# Altium PCB LNA_LNANXPSOT1209_v1.PcbDoc
Units mm, origin at the board's own origin, x right, y up, seen from the top; angles counter-clockwise.
Board outline 60.2 x 8 mm, 2 copper layers (Top Layer, Bottom Layer); 22 components, 9 nets, 54 pads, 4 vias.
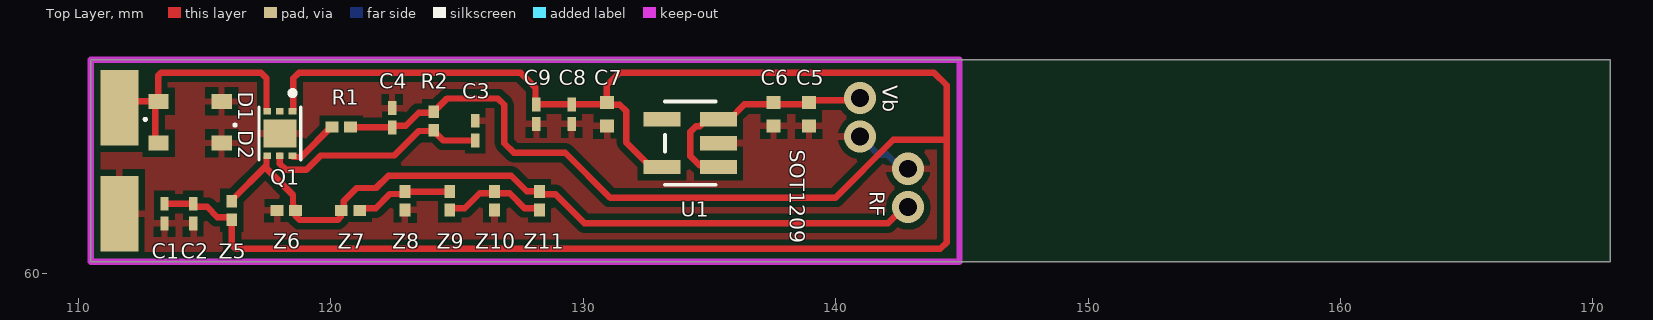
[diagram p0: Top Layer view]
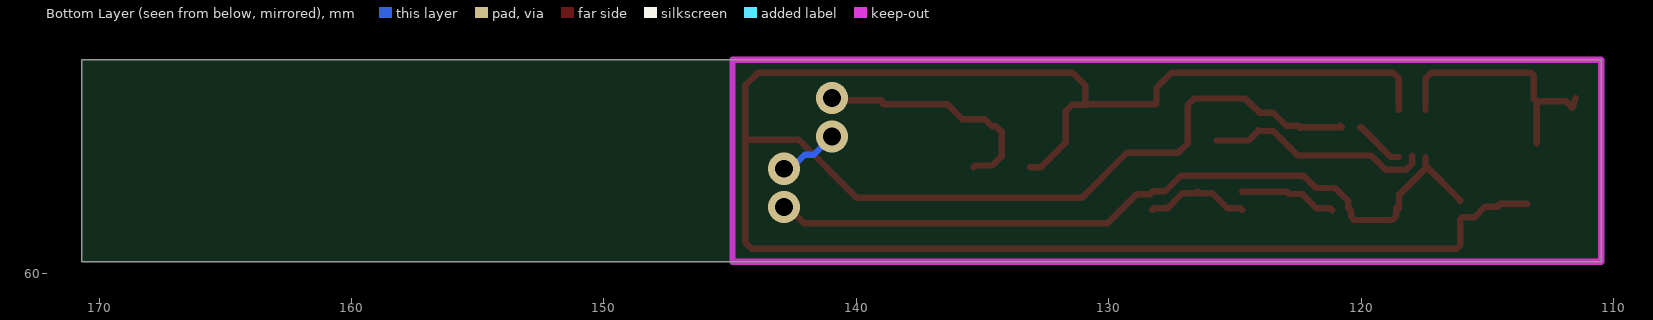
[diagram p1: Bottom Layer view, seen from below]

## Layer stack, top to bottom
Top Solder: solder mask 0.0102, Solder Resist, Dk 3.5
Top Layer: signal copper 0.0356
Dielectric 1: dielectric 0.32, FR-4, Dk 4.8
Bottom Layer: signal copper 0.0356
Bottom Solder: solder mask 0.0102, Solder Resist, Dk 3.5

## Board outline
110.49,60.452 170.688,60.452 170.688,68.453 110.49,68.453

## Design rules (kind name [scope] priority, off if disabled: settings)
Clearance [All] p1: gap=0.254 ignorepadtopadclearanceinfootprint=FALSE except(0: Arc-Hole Track-Hole SMDPad-Hole THPad-Hole Via-Hole Fill-Hole Poly-Hole Region-Hole Text-Hole)
PolygonConnect [All] p1: connectstyle=Relief reliefconductorwidth=0.254 reliefentries=4 polygonreliefangle="90 Angle" airgapwidth=0.254
RoomDefinition LNA_LNANXPSOT1209_v1 [InComponentClass('LNA_LNANXPSOT1209_v1')] p1: confinementstyle=ConfineIn formatcopy=TRUE lockcomponents=FALSE outline 144.907,60.452 110.49,60.452 110.49,68.453 144.907,68.453
RoutingVias [All] p1: holewidth=0.711 width=1.27 viastyle="Through Hole" minholewidth=0.711 minwidth=1.27 maxholewidth=0.711 maxwidth=1.27
SolderMaskExpansion [All] p1: expansion=0.102
Width [All] p1: maxlimit=0.254 minlimit=0.254 preferedwidth=0.254
30 further rules are at their usual default settings.

## Components (designator, comment, footprint, x,y, rotation, side; value= is the part's Value field where it differs from the comment)
C1 "" C0201 113.411,62.357 r270 top value=Value
C2 "" C0201 114.554,62.357 r270 top value=Value
C3 "" C0201 125.724,65.645 r270 top value=Value
C4 "" C0201 122.428,66.157 r90 top value=Value
C5 "" YAG_CC0402 138.938,66.294 r270 top value=Value
C6 "" YAG_CC0402 137.541,66.294 r270 top value=Value
C7 "" YAG_CC0402 130.937,66.294 r270 top value=Value
C8 "" C0201 129.54,66.294 r270 top value=Value
C9 "" C0201 128.143,66.294 r270 top value=Value
D1 "" INF-SOD323_V 114.427,66.802 r90 top
D2 "" INF-SOD323_V 114.427,65.151 r270 top
Q1 "BGU6101" *PSON50P130X200X35-7N 117.983,65.532 r270 top
R1 "" RES_RC0201_P6XP3 120.411,65.786 r180 top value=Value
R2 "" RES_RC0201_P6XP3 124.079,66.03 r270 top value=Value
U1 "" DBV5 134.239,65.151 r180 top value=Value
Z5 "" RES_RC0201_P6XP3 116.078,62.484 r270 top value=Value
Z6 "" RES_RC0201_P6XP3 118.237,62.484 r0 top value=Value
Z7 "" RES_RC0201_P6XP3 120.777,62.484 r0 top value=Value
Z8 "" RES_RC0201_P6XP3 122.936,62.865 r90 top value=Value
Z9 "" RES_RC0201_P6XP3 124.714,62.865 r270 top value=Value
Z10 "" RES_RC0201_P6XP3 126.492,62.865 r270 top value=Value
Z11 "" RES_RC0201_P6XP3 128.27,62.865 r90 top value=Value

## Footprints (in the part's own frame and the unit in brackets; to place one, negate y for a bottom-side part, rotate by r counter-clockwise, add the part's x,y. Pads: shape width x height; smd on the part's side, far side on the other; paste and mask are expansions set on the pad)
*PSON50P130X200X35-7N [mm]
  rect 0.26x0.3 smd: 1(-0.88,0.5) 2(-0.88,0) 3(-0.88,-0.5) 4(0.88,-0.5) 5(0.88,0) 6(0.88,0.5)
  rect 1.1x1.3 smd: 7(0,0)
  silkscreen extent -1.7,-0.83 1.05,0.83
C0201 [mil]
  rect 21.78x13 smd paste+0 mask+0: 1(-15.39,0) 2(15.39,0)
  body extent 0,0 10,10, height 10
DBV5 [mil]
  rect 57.56x22.36 smd paste+0 mask+0: 1(-44,37.4) 2(-44,0) 3(-44,-37.4) 4(44,-37.4) 5(44,37.4)
  silkscreen extent -40,-65 40,65, body extent 0,0 10,10, height 10
INF-SOD323_V [mm] "SOD, 2-Leads, Body 1.7x1.25 mm"
  rect 0.6x0.8 smd: 1(0,1.25) 2(0,-1.25)
  silkscreen extent -0.76,1.73 -0.66,1.83, body extent -0.63,-0.85 0.63,0.85, height 1.1
RES_RC0201_P6XP3 [mm]
  rect 0.503x0.43 smd paste+0 mask+0: 1(-0.366,0) 2(0.366,0)
  body extent 0,0 0.25,0.25, height 0.25
YAG_CC0402 [mil]
  rect 20x22 smd paste+0 mask+0: 1(-18.5,0) 2(18.5,0)
  body extent 0,0 10,10, height 10

## Part data
C1 C2 C3 C4 C5 C6 C7 C8 C9: library part C0201C270J3GACTU, "No Description Available", Built_By=EMA_UL_Team, Copyright="Copyright (C) 2018 Accelerated Designs. All rights reserved", Manufacturer_Part_Number=C0201C270J3GACTU, RefDes=RefDes, Type=DEV, Vendor=Kemet
D1 D2: library part BAT15-03W, "Single Silicon Schottky Diode, 110 mA IF Max, SOD32, Green", Manufacturer=Infineon, Supplier Part Number 1=N/A, ComponentLink1Description="Manufacturer URL", ComponentLink1URL=http://www.infineon.com/, ComponentLink2Description=Datasheet, ComponentLink2URL=http://www.infineon.com/dgdl/bat15series.pdf?folderId=db3a304314dca3890114ff6812070b44&fileId=db3a304314dca3890114ff6b74ca0b48&location=en.Products.RF.RF_Mixer___Detector_Schottky_Diodes.DATASHEET.bat15series.pdf, ComponentLink3Description="Package Specification", ComponentLink3URL=http://www.infineon.com/dgdl/SOD323-Package_Overview.pdf?folderId=db3a30431936bc4b011952aab84f3bbe&fileId=db3a30431936bc4b011952beed653be3, Configuration=Single, CT (typ)="0.26 pF", DatasheetVersion=Jun-2011, Green=yes, Group="RF Mixer", IF (max)="110 mA", Mounting Technology="Surface Mount", PackageDescription="2-Pin Small Outline Diode Package, 1.25 x 1.7 mm Body", PackageReference=SOD323, PartNumber=BAT15-03W, Supplier 1=Mouser, VF (typ)="0.23 V", VR (max)="4 V"
R1 R2 Z5 Z6 Z7 Z8 Z9 Z10 Z11: library part RC0201FR-0718KL, "No Description Available", Built_By=EMA_Anthony, Copyright="Copyright (C) 2018 Accelerated Designs. All rights reserved", Manufacturer_Part_Number=RC0201FR-0718KL, RefDes=RefDes, Type=DEV, Vendor=Yageo
U1: library part LP5907MFX-3.3/NO, "No Description Available", Manufacturer_Part_Number=LP5907MFX-3.3/NOPB, Built_By=EMA_UL_Team, Copyright="Copyright (C) 2018 Accelerated Designs. All rights reserved", RefDes=RefDes, Type=DEV, Vendor="Texas Instruments"

## Free pads (board coordinates)
  rect 1.5x3 smd: ""(111.633,62.357) ""(111.633,66.548)

## Via types
v1: diameter 1.27, hole 0.711, Top Layer to Bottom Layer, 4 vias

## Nets (pads, with @x,y where several pads share a name; then routed paths per layer and width w, separated by ;. In a path a pad name is that pad's centre, name@x,y a point inside that pad or via, vN(x,y) a via of type N, cw(c..) or ccw(c..) an arc to the next point about the centre after c; other vN are vias at no path point)
CUR_ADJ: Q1.6 R1.2 | length 2
  Top Layer w0.254: Q1.6@118.514,64.601 118.824,64.601 120.009,65.786 R1.2
ENABLE: C3.2 Q1.5 R2.2 | length 9
  Top Layer w0.254: Q1.5 117.983,64.333 118.223,64.093 119.034,64.093 119.599,64.658 122.511,64.658 123.483,65.63 124.044,65.63 R2.2 124.079,65.628 124.452,65.255 C3.2
GND: C1.2 C2.2 C3.1 C4.2 C5.2 C6.2 C7.2 C8.2 C9.2 D1.2 D2.1 pad.@111.633,62.357 Q1.7 U1.2 Z6.1 Z8.1 Z10.2 | length 2.4
  Bottom Layer w0.254: v1(140.97,65.405) 141.688,64.687 142.048,64.687 142.6,64.135 v1(142.875,64.135)
NetZ7_2: Z7.2 Z8.2 Z9.1 | length 3.9
  Top Layer w0.254: Z7.2 121.229,62.57 121.775,62.57 122.34,63.134 122.848,63.134 122.936,63.222 Z8.2 Z9.1
NetZ9_2: Z9.2 Z10.1 Z11.1 | length 4.2
  Top Layer w0.254: Z9.2 124.787,62.572 125.31,62.572 125.896,63.158 126.419,63.158 Z10.1 126.565,63.158 127.088,63.158 127.674,62.572 128.197,62.572 Z11.1
RF_IN: D1.1 D2.2 pad.@111.633,66.548 Q1.3 | length 10.3
  Top Layer w0.254: pad.@111.506,66.929 111.633,66.548 111.887,66.802 D1.1@113.05,66.802 ; D2.2@113.05,65.151 D1.1@113.05,66.802 ; Q1.3@117.452,66.463 117.452,67.714 117.221,67.945 113.284,67.945 113.157,67.818 113.157,66.909 D1.1@113.05,66.802
RF_OUT: Q1.4 Z5.1 Z6.2 Z7.1 Z11.2 | length 31.2
  Top Layer w0.254: Z5.1 116.078,62.886 117.452,64.26 ; Q1.4@117.452,64.601 117.452,64.26 ; Z6.2@118.592,62.611 118.603,62.611 Z6.2@118.618,62.596 ; Z6.2 118.592,62.484 118.504,62.572 118.504,63.094 117.452,64.146 117.452,64.26 ; Z6.2@118.618,62.469 118.618,62.252 118.767,62.103 120.269,62.103 120.396,62.23 120.396,62.469 Z7.1 120.422,62.484 120.51,62.572 120.51,62.857 121.026,63.373 121.793,63.373 122.283,63.863 127.145,63.863 127.762,63.246 128.255,63.246 Z11.2 128.27,63.22 128.358,63.132 128.892,63.132 130.048,61.976 142.073,61.976 142.708,62.611 v1(142.875,62.611)
Vbatt: C5.1 C6.1 U1.1 U1.3 | length 9.6
  Top Layer w0.254: U1.1 135.296,64.262 134.62,64.262 134.245,64.637 134.245,65.593 134.468,65.816 134.625,65.816 134.91,66.101 U1.3 135.804,66.101 136.387,66.685 138.938,66.685 C5.1 139.021,66.846 140.887,66.846 v1(140.97,66.929)
Vcc: C1.1 C2.1 C4.1 C7.1 C8.1 C9.1 Q1.1 R1.1 R2.1 U1.5 Z5.2 | length 99.6
  Top Layer w0.254: C1.1 114.516,62.748 114.592,62.672 114.592,62.624 115.1,62.624 115.506,62.217 115.99,62.217 116.078,62.129 Z5.2 116.078,61.109 116.227,60.96 144.145,60.96 144.399,61.214 144.399,65.278 ; Q1.1@118.514,66.463 118.514,67.714 118.745,67.945 127.508,67.945 128.11,67.343 128.11,66.717 C9.1 C8.1 C7.1@130.937,66.685 ; R1.1@120.836,65.845 R1.1 122.408,65.786 C4.1 122.428,65.801 122.466,65.839 122.974,65.839 123.483,66.348 124.031,66.348 R2.1 124.079,66.432 124.167,66.521 124.204,66.521 124.602,66.919 126.619,66.919 126.873,66.665 126.873,65.151 127.254,64.77 129.286,64.77 131.064,62.992 139.994,62.992 142.28,65.278 144.399,65.278 ; U1.5 132.674,64.201 131.699,65.176 131.699,66.421 131.445,66.675 130.947,66.675 C7.1@130.937,66.685 ; C7.1@130.937,66.685 C7.1 130.937,67.437 131.445,67.945 143.891,67.945 144.399,67.437 144.399,65.278
pads on no net: Q1.2 U1.4

## Polygon pours and split planes (outlines as drawn)
GND on Top Layer "Top Layer-GND" (solid, remove dead copper, pour order 46): 110.49,68.453 110.49,60.452 144.907,60.452 144.907,68.453
no net on Top Layer "Top Layer-No Net 2" (solid, pour order 32): 110.49,68.453
no net on Top Layer "Top Layer-No Net" (solid, pour order 2): 135.509,66.294

## Keep-outs
Keep-Out Layer:
  lines w0.254: 110.49,60.452 144.907,60.452 144.907,68.453 110.49,68.453 110.49,60.452

## Silkscreen, mask and mechanical layers (free items; w line width, h text height)
Top Overlay:
  text "Vb" at 141.859,67.437 h0.6 r270
  text "SOT1209" at 138.176,64.897 h0.6 r270
  text "RF" at 141.351,63.246 h0.6 r270